# Altium PCB conn_board.PcbDoc (part 1 of 2)
Units mm, origin at the board's own origin, x right, y up, seen from the top; angles counter-clockwise.
Board outline 125 x 100 mm, 2 copper layers (Top Layer, Bottom Layer); 85 components, 65 nets, 284 pads, 72 vias.
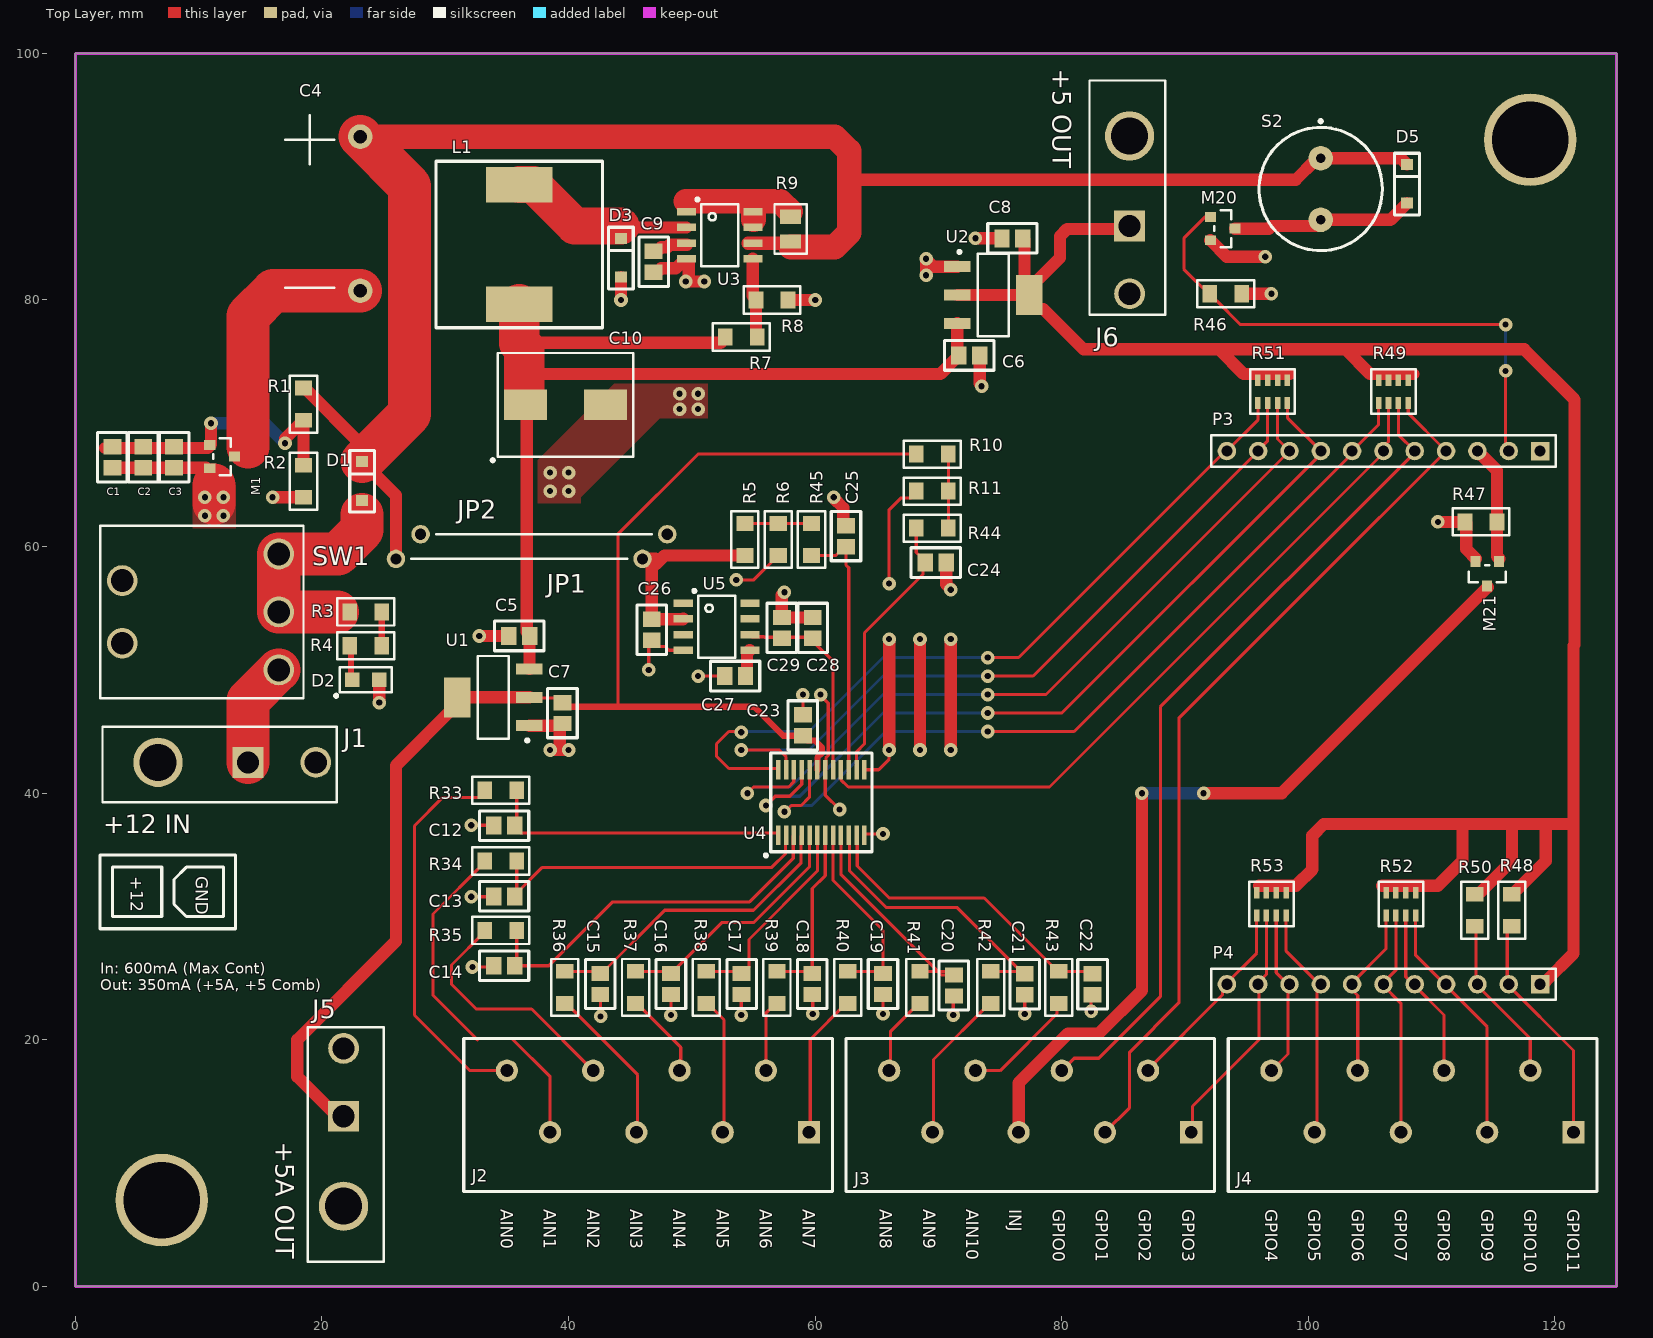
[diagram p0: Top Layer view]
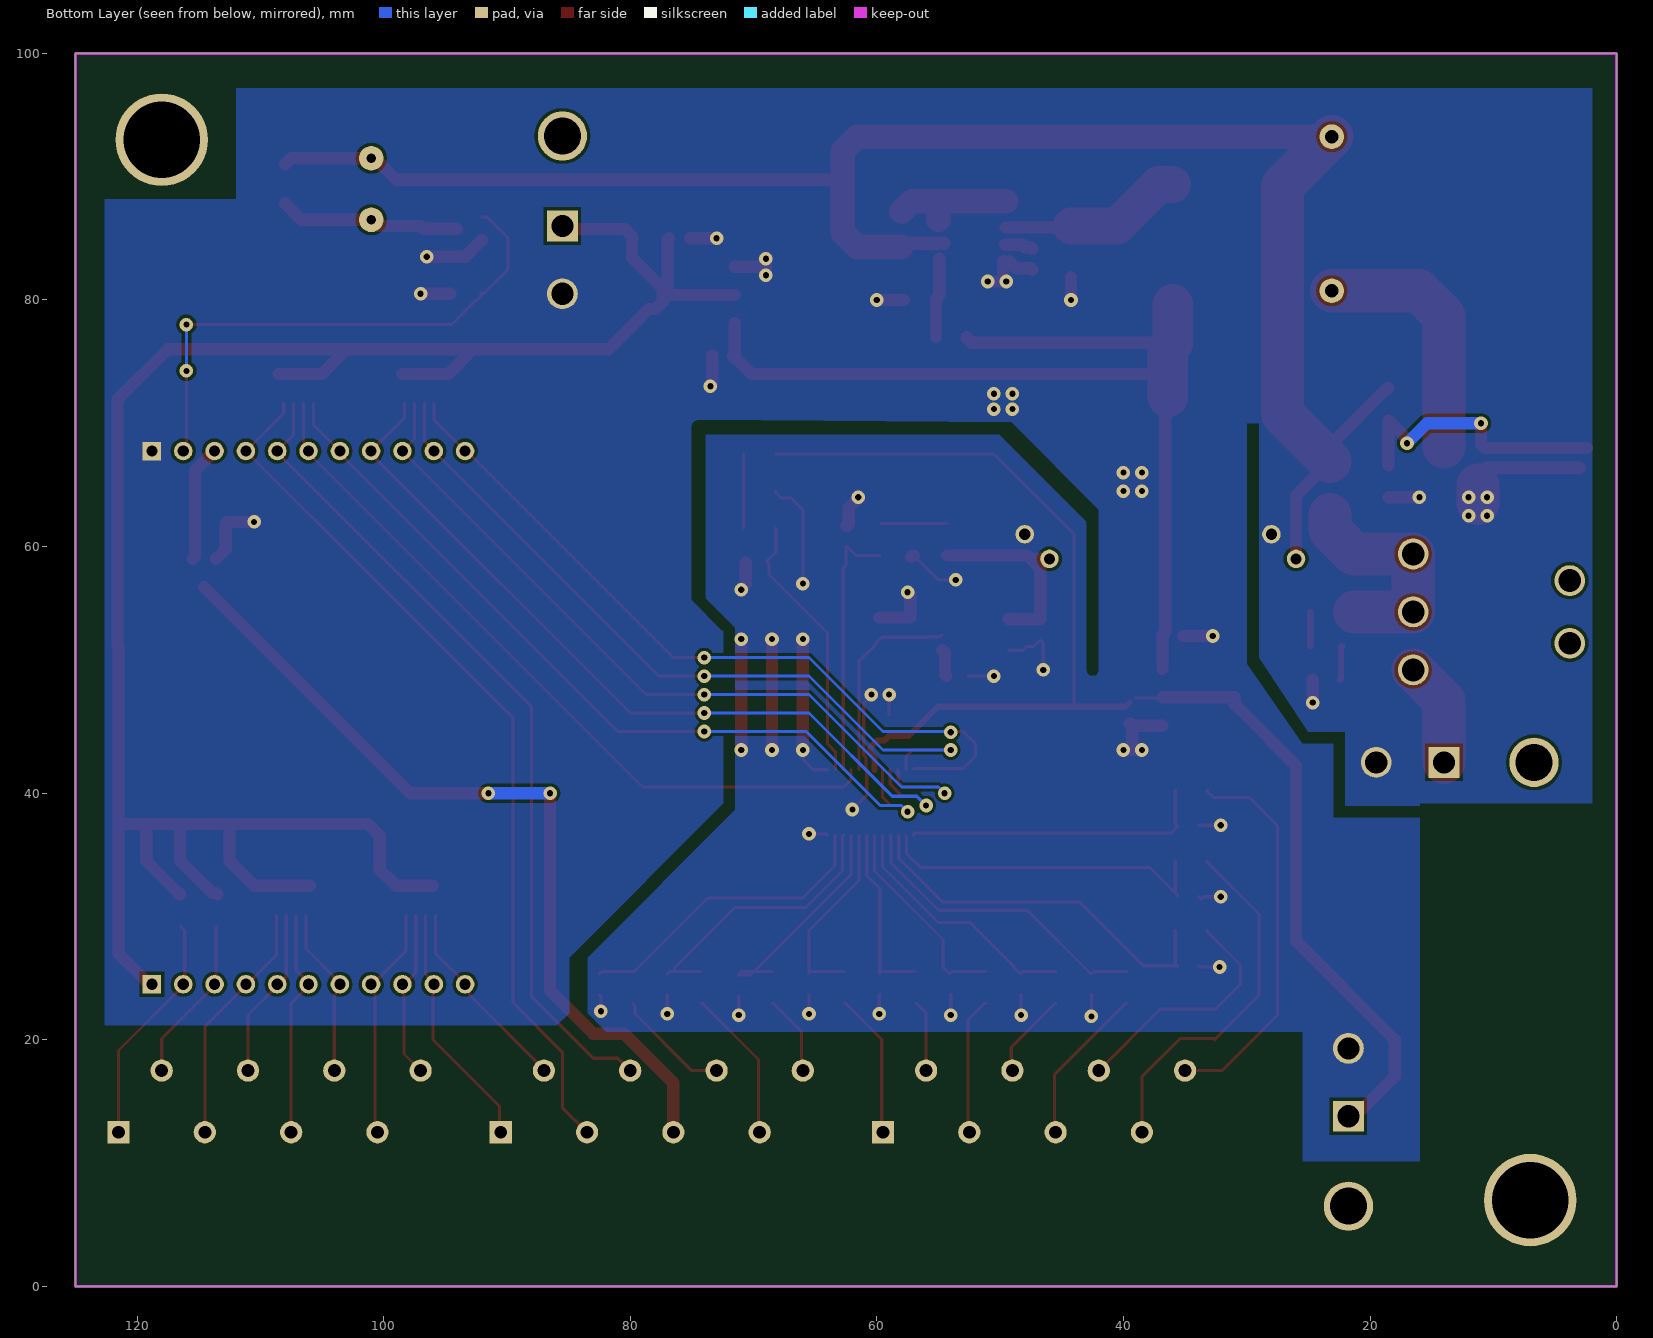
[diagram p1: Bottom Layer view, seen from below]

## Layer stack, top to bottom
Top Solder: solder mask 0.0102, Solder Resist, Dk 3.5
Top Layer: signal copper 0.0356
Dielectric 1: dielectric 0.32, FR-4, Dk 4.8
Bottom Layer: signal copper 0.0356
Bottom Solder: solder mask 0.0102, Solder Resist, Dk 3.5

## Board outline
0,0 125,0 125,100 0,100

## Design rules (kind name [scope] priority, off if disabled: settings)
BoardOutlineClearance BoardOutlineClearance_JLC [All] p1: gap=0.2 ignorepadtopadclearanceinfootprint=FALSE
Clearance Clearance_JLC [All] p1: gap=0.254 ignorepadtopadclearanceinfootprint=FALSE except(0: SMDPad-Hole Fill-Hole Poly-Hole Region-Hole Text-Hole; 0.127: Arc-Arc Arc-Track Track-Track SMDPad-SMDPad Fill-Fill Fill-Poly Fill-Region Poly-Region Region-Region; 0.15: SMDPad-Text THPad-Text Via-Text; 0.2: Arc-SMDPad Track-SMDPad; 0.33: Arc-THPad Track-THPad; 0.54: THPad-THPad THPad-Via THPad-Hole Via-Hole; 1: Poly-Poly)
Clearance [All] p2: gap=0.254 ignorepadtopadclearanceinfootprint=FALSE except(0: Arc-Hole Track-Hole SMDPad-Hole THPad-Hole Via-Hole Fill-Hole Poly-Hole Region-Hole Text-Hole)
HoleSize ViaSize_JLC [IsVia] p1: absolutevalues=TRUE maxlimit=6.3 minlimit=0.3 maxpercent=80.000 minpercent=20.000
HoleSize PadSize_JLC [IsPad] p2: absolutevalues=TRUE maxlimit=6.35 minlimit=0.7 maxpercent=80.000 minpercent=20.000
HoleSize HoleSize_JLC [All] p3: absolutevalues=TRUE maxlimit=6.3 minlimit=0.25 maxpercent=80.000 minpercent=20.000
HoleSize [All] p4: absolutevalues=TRUE maxlimit=2.54 minlimit=0.025 maxpercent=80.000 minpercent=20.000
HoleToHoleClearance HoleToHoleClearance_JLC [All] p1: gap=0.5 allowstackedmicrovias=TRUE
HoleToHoleClearance [All] p2: gap=0.254 allowstackedmicrovias=TRUE
MinimumAnnularRing MinViaDiam_JLC [IsVia] p1: minimumring=0.23
MinimumAnnularRing PTHDiam_JLC [All] p2: minimumring=0.15
MinimumSolderMaskSliver [All] p1: minsoldermaskwidth=0.2
PlaneClearance PlaneClearance_inPolygon [InPolygon] p1: clearance=1
PlaneClearance PlaneClearance_JLC [All] p2: clearance=1
PlaneClearance [All] p3: clearance=0.508
PolygonConnect PolygonConnect_Via [All] p1: connectstyle=Direct reliefconductorwidth=0.4 reliefentries=4 polygonreliefangle="90 Angle" airgapwidth=0.254
PolygonConnect [All] p2: connectstyle=Relief reliefconductorwidth=0.254 reliefentries=4 polygonreliefangle="90 Angle" airgapwidth=0.254
RoutingVias RoutingVias_JLC [All] p1: holewidth=0.711 width=1.27 viastyle="Through Hole" minholewidth=0.02 minwidth=0.45 maxholewidth=0.711 maxwidth=1.27
RoutingVias [All] p2: holewidth=0.711 width=1.27 viastyle="Through Hole" minholewidth=0.711 minwidth=1.27 maxholewidth=0.711 maxwidth=1.27
SilkToSolderMaskClearance PadToSilk_JLC [IsPad] p1: minsilkscreentomaskgap=0.15 clearancetoexposedcopper=TRUE
SolderMaskExpansion SolderMaskExpansion_JLC [All] p1: expansion=0.05 istentingtop=FALSE
SolderMaskExpansion [All] p2: expansion=0.102 istentingtop=FALSE
Width Width_JLC_GND [InNet('GND')] p1: maxlimit=5.5 minlimit=0.127 preferedwidth=0.254 minimp=50.000000 maximp=50.000000 favimp=50.000000
Width Width_JLC_HighPower [InNetClass('HighPower')] p2: maxlimit=5.5 minlimit=1 preferedwidth=3.3 minimp=50.000000 maximp=50.000000 favimp=50.000000
Width Width_JLC_LowPower [InNetClass('LowPower')] p3: maxlimit=2 minlimit=0.254 preferedwidth=1.5 minimp=50.000000 maximp=50.000000 favimp=50.000000
Width Width_JLC_Signal [InNetClass('Signal')] p4: maxlimit=1 minlimit=0.127 preferedwidth=0.254
Width Width_JLC [All] p5: maxlimit=1 minlimit=0.127 preferedwidth=0.254
Width [All] p6: maxlimit=0.254 minlimit=0.254 preferedwidth=0.254
25 further rules are at their usual default settings.

## Classes and differential pairs
net class Signal: 5VREF 12VDO +5 +5A AIN0 AIN1 AIN2 AIN3 AIN4 AIN5 AIN6 AIN7 AIN8 AIN9 AIN10 BUZZER FAIN0 FAIN1 FAIN2 FAIN3 FAIN4 FAIN5 FAIN6 FAIN7 FAIN8 FAIN9 FAIN10 FAIN13 FAIN14 GND GPIO0 GPIO1 GPIO2 GPIO3 GPIO4 GPIO5 GPIO6 GPIO7 GPIO8 GPIO9 GPIO10 GPIO11 INJ INJSW NetC1_2 NetP3_6 NetP3_7 NetP3_8 NetP3_9 NetP3_10 NetP3_11 NetR5_1 NetR7_2 NetR10_1
net class LowPower: 6VDCDC 12VDO +5 +5A BUZZER GND INJ INJSW NetD2_2 NetD5_2 NetR3_1
net class HighPower: 6VDCDC 12VDO +12 GND NetC4_2 NetJ1_1 SWITCH_COLLECTOR SWITCH_EMITTER
component class conn_board_power: C1 C2 C3 C4 C5 C6 C7 C8 C9 C10 D1 D2 D3 J1 L1 M1 R1 R2 R3 R4 R5 R6 R7 R8 R9 R10 R11 S1 SW1 U1 U2 U3
component class conn_board_interfaces: D5 J2 J3 J4 J5 J6 M20 M21 P3 P4 R46 R47 R48 R49 R50 R51 R52 R53 S2
component class conn_board_adc: C12 C13 C14 C15 C16 C17 C18 C19 C20 C21 C22 C23 C24 C25 C26 C27 C28 C29 JP1 JP2 R33 R34 R35 R36 R37 R38 R39 R40 R41 R42 R43 R44 R45 U4 U5

## Components (designator, comment, footprint, x,y, rotation, side; value= is the part's Value field where it differs from the comment)
C1 "4.7uF" CAP_0805 3,67.25 r90 top
C2 "4.7uF" CAP_0805 5.5,67.25 r90 top
C3 "4.7uF" CAP_0805 8,67.25 r90 top
C4 "22000uF" UVR1C223MRD6_BENT_F 23.1,87 r180 top
C5 "1uF" CAP_0805 36,52.75 r0 top
C6 "1uF" CAP_0805 72.5,75.5 r180 top
C7 "4.7uF" CAP_0805 39.5,46.5 r90 top
C8 "4.7uF" CAP_0805 76,85 r0 top
C9 "390pF" CAP_0805 46.9,83.1 r90 top
C10 "470uF" UUD1C471MNL1GS 39.75,71.5 r90 top
C12 "0.1uF" CAP_0805 34.773,37.365 r0 top
C13 "0.1uF" CAP_0805 34.773,31.631 r0 top
C14 "0.1uF" CAP_0805 34.773,26 r0 top
C15 "0.1uF" CAP_0805 42.568,24.523 r90 top
C16 "0.1uF" CAP_0805 48.301,24.523 r90 top
C17 "0.1uF" CAP_0805 54.034,24.523 r90 top
C18 "0.1uF" CAP_0805 59.767,24.523 r90 top
C19 "0.1uF" CAP_0805 65.5,24.523 r90 top
C20 "0.1uF" CAP_0805 71.25,24.4 r90 top
C21 "0.1uF" CAP_0805 77,24.5 r90 top
C22 "0.1uF" CAP_0805 82.5,24.5 r90 top
C23 "0.1uF" CAP_0805 59,45.5 r90 top
C24 "0.1uF" CAP_0805 69.773,58.7 r180 top
C25 "0.1uF" CAP_0805 62.5,60.85 r270 top
C26 "4.7uF" CAP_0805 46.75,53.25 r90 top
C27 "1uF" CAP_0805 53.5,49.5 r0 top
C28 "4.7uF" CAP_0805 59.8,53.4 r270 top
C29 "1uF" CAP_0805 57.3,53.4 r270 top
D1 "1N5819" SOD123 23.25,66.9 r0 top
D2 "RED" 150080SS75000 23.55,49.2 r180 top
D3 "1N5819" SOD123 44.25,85 r0 top
D5 "1N5819" SOD123 108,91 r0 top
J1 "CONN HEADER R/A 2POS" "2 POS MOLEX" 6.7,42.5 r270 top
J2 "TBL002A-350-08GR-2OR" CUI_TBL002A-350-08GR-2OR 59.5,12.5 r180 top
J3 "TBL002A-350-08GR-2OR" CUI_TBL002A-350-08GR-2OR 90.5,12.5 r180 top
J4 "TBL002A-350-08GR-2OR" CUI_TBL002A-350-08GR-2OR 121.5,12.5 r180 top
J5 "CONN HEADER R/A 2POS" "2 POS MOLEX" 21.75,6.5 r0 top
J6 "CONN HEADER R/A 2POS" "2 POS MOLEX" 85.5,93.3 r180 top
JP1 "JUMPER" JMP_20MM 46,59 r180 top
JP2 "JUMPER" JMP_20MM 48,61 r180 top
L1 "220µH" INDP125125X600N 36,84.5 r90 top
M1 "DMN6075S-7" FP-SOT23-MFG 11.9,67.3 r0 top
M20 "DMN6075S-7" FP-SOT23-MFG 93.05,85.79 r0 top
M21 "DMN6075S-7" FP-SOT23-MFG 114.5,57.8 r270 top
P3 "Header 11" HDR1X11 118.79,67.75 r180 top
P4 "Header 11" HDR1X11 118.79,24.5 r180 top
R1 "1MR" RES_0805_PANASONIC 18.5,71.55 r0 top
R2 "160kR" RES_0805_PANASONIC 18.5,65.3 r180 top
R3 "330R" RES_0805_PANASONIC 23.55,54.7 r270 top
R4 "330R" RES_0805_PANASONIC 23.55,51.95 r90 top
R5 "4.7kR" RES_0805_PANASONIC 54.3,60.577 r0 top
R6 "1.24kR" RES_0805_PANASONIC 57,60.577 r0 top
R7 "4.7kR" RES_0805_PANASONIC 54,77 r90 top
R8 "1.24kR" RES_0805_PANASONIC 56.5,80 r270 top
R9 "250mR" CSR1206FKR250 58,85.75 r90 top
R10 "1.24kR" RES_0805_PANASONIC 69.5,67.5 r270 top
R11 "1.24kR" RES_0805_PANASONIC 69.5,64.5 r90 top
R33 "330R" RES_0805_PANASONIC 34.5,40.233 r90 top
R34 "330R" RES_0805_PANASONIC 34.5,34.5 r90 top
R35 "330R" RES_0805_PANASONIC 34.5,28.869 r90 top
R36 "330R" RES_0805_PANASONIC 39.699,24.25 r180 top
R37 "330R" RES_0805_PANASONIC 45.432,24.25 r180 top
R38 "330R" RES_0805_PANASONIC 51.165,24.25 r180 top
R39 "330R" RES_0805_PANASONIC 56.898,24.25 r180 top
R40 "330R" RES_0805_PANASONIC 62.631,24.25 r180 top
R41 "330R" RES_0805_PANASONIC 68.5,24.25 r180 top
R42 "330R" RES_0805_PANASONIC 74.25,24.25 r180 top
R43 "330R" RES_0805_PANASONIC 79.75,24.25 r180 top
R44 "330R" RES_0805_PANASONIC 69.5,61.5 r270 top
R45 "330R" RES_0805_PANASONIC 59.7,60.577 r0 top
R46 "4.7kR" RES_0805_PANASONIC 93.3,80.5 r90 top
R47 "4.7kR" RES_0805_PANASONIC 114,62 r270 top
R48 "4.7kR" RES_0805_PANASONIC 116.5,30.5 r180 top
R49 "4.7kR" CAY16-472J4LF 106.9,72.575 r180 top
R50 "4.7kR" RES_0805_PANASONIC 113.5,30.5 r180 top
R51 "4.7kR" CAY16-472J4LF 97.1,72.575 r180 top
R52 "4.7kR" CAY16-472J4LF 107.5,31 r180 top
R53 "4.7kR" CAY16-472J4LF 97,31 r180 top
S2 "CMI-9605-1280T" CMI-9605-1280T 101,89 r0 top
SW1 "SPDT" 100SP1T2B4M6QE 16.5,54.7 r270 top
U1 "LDL1117S50R" SOT230P700X180-4N 33.9,47.775 r180 top
U2 "LDL1117S50R" SOT230P700X180-4N 74.45,80.4 r0 top
U3 "MC33063ADR" SOIC_8 52.25,85.25 r0 top
U4 "MAX11624EEG+" QSOP24 60.5,39.25 r90 top
U5 "REF5050AIDR" SOIC_8 52,53.5 r0 top

## Footprints (in the part's own frame and the unit in brackets; to place one, negate y for a bottom-side part, rotate by r counter-clockwise, add the part's x,y. Pads: shape width x height; smd on the part's side, far side on the other; paste and mask are expansions set on the pad)
"2 POS MOLEX" [mm] "1724480002"
  rect 2.5x2.5 hole 1.8 mask+0.06: 1(0,7.3)
  round 2.5 hole 1.8 mask+0.06: 2(0,12.8)
  round 4 hole 3 unplated mask+0.06: MNT(0,0)
  silkscreen extent -2.9,-4.5 3.25,14.5, body extent -2.7,-6.57 3.1,13.37, height 11.4
100SP1T2B4M6QE [mm]
  round 2.5 hole 1.85 mask+0.06: 1(4.7,0) 1(4.7,0) 2(0,0) 2(0,0) 3(-4.7,0) 3(-4.7,0) 4(-2.54,-12.7) 4(-2.54,-12.7) 4(2.54,-12.7) 4(2.54,-12.7)
  silkscreen extent -7,-14.5 7,2, body extent -6.35,-26.56 6.35,0.59, height 6.87
150080SS75000 [mm] "150080SS75000"
  rect 1.2x1.2 smd mask+0.06: 1(-1.1,0) 2(1.1,0)
  silkscreen extent -2.1,-1 2.52,1.42
CAP_0805 [mm] "Chip Capacitor, 2-Leads, Body 2.05x1.30mm, IPC Medium Density"
  rect 1.25x1.45 smd mask+0.06: 1(-0.85,0) 2(0.85,0)
  silkscreen extent -2,-1.2 2,1.2, body extent -1.07,-0.7 1.07,0.7, height 1.25
CAY16-472J4LF [mm] "CAY16-472J4LF"
  rect 0.45x0.95 smd mask+0.06: 1(-1.2,0.925) 2(-1.2,-0.925) 3(-0.4,0.925) 4(-0.4,-0.925) 5(0.4,0.925) 6(0.4,-0.925) 7(1.2,0.925) 8(1.2,-0.925)
  silkscreen extent -1.8,-1.8 1.8,1.8, body extent -1.6,-0.8 1.6,0.8, height 0.51
CMI-9605-1280T [mm] "MAGNETIC BUZZER INDICATOR"
  round 2 hole 0.75 mask+0.06: 1(0,2.5) 2(0,-2.5)
  silkscreen extent -5,-5 5,5.62, body extent -4.8,-4.8 4.8,4.8, height 5.01
CSR1206FKR250 [mm] "1206 Res"
  rect 1.15x1.7 smd mask+0.06: 1(-1,0) 2(1,0)
  silkscreen extent -2,-1.3 2,1.3, body extent -1.52,-0.77 1.52,0.78, height 0.54
CUI_TBL002A-350-08GR-2OR [mm]
  rect 1.8x1.8 hole 1.05 mask+0.06: 1(0,0)
  round 1.8 hole 1.05 mask+0.06: 2(3.5,-5) 3(7,0) 4(10.5,-5) 5(14,0) 6(17.5,-5) 7(21,0) 8(24.5,-5)
  silkscreen extent -1.9,-7.6 28,4.8, body extent -1.73,-7.4 27.78,4.6, height 12.85
FP-SOT23-MFG [mm]
  rect 0.9x0.8 smd paste+0 mask+0: D(1,0) G(-1,0.95) S(-1,-0.95)
  silkscreen extent -0.7,-1.5 0.7,1.5, body extent -1.55,-1.6 1.55,1.6, height 0.25
HDR1X11 [mm] "Connector; Header; 11 Position"
  rect 1.5x1.5 hole 0.9: 1(0,0)
  round 1.5 hole 0.9: 2(2.54,0) 3(5.08,0) 4(7.62,0) 5(10.16,0) 6(12.7,0) 7(15.24,0) 8(17.78,0) 9(20.32,0) 10(22.86,0) 11(25.4,0)
  silkscreen extent -1.27,-1.27 26.67,1.27
INDP125125X600N [mm]
  rect 2.9x5.4 smd mask+0.06: 1(-4.85,0) 2(4.85,0)
  silkscreen extent -6.75,-6.75 6.75,6.75, body extent -6.25,-6.25 6.25,6.25, height 6
JMP_20MM [mm]
  round 1.5 hole 0.9 mask+0.06: 1(0,0) 2(20,0)
  silkscreen extent 1.25,0 18.75,0
QSOP24 [mm]
  rect 1.6x0.36 smd mask+0.06: 1(-2.66,3.492) 2(-2.66,2.857) 3(-2.66,2.222) 4(-2.66,1.587) 5(-2.66,0.952) 6(-2.66,0.317) 7(-2.66,-0.318) 8(-2.66,-0.953) 9(-2.66,-1.588) 10(-2.66,-2.222) 11(-2.66,-2.857) 12(-2.66,-3.492) 13(2.66,-3.492) 14(2.66,-2.857) 15(2.66,-2.222) 16(2.66,-1.587) 17(2.66,-0.952) 18(2.66,-0.317) 19(2.66,0.318) 20(2.66,0.953) 21(2.66,1.588) 22(2.66,2.222) 23(2.66,2.857) 24(2.66,3.492)
  silkscreen extent -4.42,-4.1 4,4.62
RES_0805_PANASONIC [mm]
  rect 1.4x1.2 smd mask+0.06: 1(0,1.3) 2(0,-1.3)
  silkscreen extent -1.1,-2.3 1.1,2.3
SOD123 [mm]
  rect 0.95x0.9 smd mask+0.06: 1(0,0) 2(0,-3.15)
  silkscreen extent -1,-4.1 1,0.9
SOIC_8 [mm] "SOIC, 8-Leads, Body 4.91x3.90mm, Pitch 1.27mm, IPC Medium Density"
  rect 1.55x0.6 smd mask+0.06: 1(-2.7,1.905) 2(-2.7,0.635) 3(-2.7,-0.635) 4(-2.7,-1.905) 5(2.7,-1.905) 6(2.7,-0.635) 7(2.7,0.635) 8(2.7,1.905)
  silkscreen extent -1.92,-2.5 1.5,3.02, body extent -3,-2.5 3,2.5, height 1.75
SOT230P700X180-4N [mm] "SOT223, 4-Leads, Body 6.50x7.00mm (avg), Pitch 2.30mm, IPC Medium Density"
  rect 2.15x0.9 smd mask+0.06: 1(-2.925,2.3) 2(-2.925,0) 3(-2.925,-2.3)
  rect 2.15x3.25 smd mask+0.06: 2(2.925,0)
  silkscreen extent -2.88,-3.35 1.25,3.62, body extent -3.5,-3.35 3.5,3.35, height 1.8
UUD1C471MNL1GS [mm] "UUD1C471MNL1GS"
  rect 2.5x3.5 smd mask+0.06: 1(0,3.25) 2(0,-3.25)
  silkscreen extent -4.62,-5.5 4.2,6.02
UVR1C223MRD6_BENT_F [mm] "UVR1C223MRD6"
  round 2 hole 1.1 mask+0.06: 1(0,-6.25) 2(0,6.25)
  body extent 7,-12.49 47,12.49, height 25

## Part data
C1 C2 C3 C7 C8 C26 C28: library part CL21A475KAQNNNE, "SAMSUNG ELECTRO-MECHANICS - CL21A475KAQNNNE - SMD Multilayer Ceramic Capacitor, 4.7 µF, 25 V, 0805 [2012 Metric], ± 10%, X5R, CL Series", Case Code (Imperial)=0805, Case Code (Metric)=2012, Dielectric=X5R, Manufacturer=Samsung, Max Operating Temperature=85°C, Min Operating Temperature=-55°C, Package Quantity=1, Supplier Part Number 1=1276-1244-1-ND, Tolerance=10%, Voltage Rating=25V, Capacitance=4.7uF, Case/Package=0805, Category="Ceramic Capacitors", ComponentLink1Description=https://datasheet.ciiva.com/25798/cl21a475kaqnnne-25798882.pdf?src-supplier=Digi-Key, ComponentLink1URL=https://datasheet.ciiva.com/25798/cl21a475kaqnnne-25798882.pdf?src-supplier=Digi-Key, Depth=1.25mm, Height=1.25mm, Lead Free="Lead Free", Length=2mm, Manufacturer Part Number=CL21A475KAQNNNE, Mount="Surface Mount", Packaging="Tape and Reel", Pricing 1="1=0.11000, 10=0.08100, 50=0.04600, 100=0.03820, 500=0.02678, 1000=0.02216 (USD)", Radiation Hardening=No, RoHS=Yes, Stock 1=671990, Supplier 1=Digi-Key, Thickness=0.055inch, Voltage Rating (DC)=25V, Width=0.049inch
C4: library part UVR1C223MRD6, "Cap Aluminum 22000uF 16V 20% (25 X 40mm) Radial 12.5mm 4000mA 2000 hr 85°C Bulk", Capacitance=22mF, Case/Package=Radial, Dielectric Material=Aluminium, Leakage Current=10.56mA, Manufacturer=Nichicon, Max Operating Temperature=85°C, Min Operating Temperature=-40°C, Package Quantity=180, Ripple Current=4A, Supplier Part Number 1=493-1054-ND, Tolerance=20%, Voltage Rating=16V, Category=Capacitor, ComponentLink1Description=https://datasheet.ciiva.com/17515/e-vr-17515877.pdf?src-supplier=Avnet+Europe, ComponentLink1URL=https://datasheet.ciiva.com/17515/e-vr-17515877.pdf?src-supplier=Avnet+Europe, ComponentLink2Description=https://datasheet.ciiva.com/118/e-vr-118733.pdf?src-supplier=Digi-Key, ComponentLink2URL=https://datasheet.ciiva.com/118/e-vr-118733.pdf?src-supplier=Digi-Key, ComponentLink3Description=http://datasheet.octopart.com/UVR1C223MRD6-Nichicon-datasheet-2149.pdf?src-supplier=Digi-Key, ComponentLink3URL=http://datasheet.octopart.com/UVR1C223MRD6-Nichicon-datasheet-2149.pdf?src-supplier=Digi-Key, ComponentLink4Description=http://datasheet.octopart.com/UVR1C223MRD6-Nichicon-datasheet-12518647.pdf?src-supplier=Newark, ComponentLink4URL=http://datasheet.octopart.com/UVR1C223MRD6-Nichicon-datasheet-12518647.pdf?src-supplier=Newark, ComponentLink5Description=http://datasheet.octopart.com/UVR1C223MRD6-Nichicon-datasheet-24896455.pdf?src-supplier=TME, ComponentLink5URL=http://datasheet.octopart.com/UVR1C223MRD6-Nichicon-datasheet-24896455.pdf?src-supplier=TME, ComponentLink6Description=http://datasheet.octopart.com/UVR1C223MRD6-Nichicon-datasheet-41169141.pdf?src-supplier=Newark, ComponentLink6URL=http://datasheet.octopart.com/UVR1C223MRD6-Nichicon-datasheet-41169141.pdf?src-supplier=Newark, ComponentLink7Description=http://datasheet.octopart.com/UVR1C223MRD6-Nichicon-datasheet-58177256.pdf?src-supplier=Newark, ComponentLink7URL=http://datasheet.octopart.com/UVR1C223MRD6-Nichicon-datasheet-58177256.pdf?src-supplier=Newark, Contact Plating=Tin, Diameter=25mm, Dissipation Factor=0.2%, Height=40mm, Height - Seated (Max)=1.575inch, Lead Diameter=1mm, Lead Free="Lead Free", Lead Pitch=12.5mm, Length=40mm, Life (Hours)=2000Hour, Manufacturer Part Number=UVR1C223MRD6, Mount="Through Hole", Number of Pins=2, Packaging=Bulk, Pricing 1="1=3.85000, 10=3.46700, 50=3.00440, 100=2.61910, 500=2.15694, 1000=2.00287, 2500=1.96436, 5000=1.92584 (USD)", Radiation Hardening=No, Stock 1=153, Supplier 1=Digi-Key, Termination=Radial, Voltage Rating (DC)=16V
C5 C6 C27 C29: library part C0805C105Z4VACTU, "Cap Ceramic 1uF 16V Y5V -20% to 80% Pad SMD 0805 85C T/R", Case Code (Imperial)=0805, Case Code (Metric)=2012, Dielectric=Y5V, Dielectric Material=Ceramic, Manufacturer=KEMET, Max Operating Temperature=85°C, Min Operating Temperature=-30°C, Package Quantity=1, Supplier Part Number 1=399-8011-1-ND, Tolerance=80%, Voltage=16V, Capacitance=1uF, Case/Package=0805, Category=Capacitor, ComponentLink1Description=https://datasheet.ciiva.com/6074/1698780-6074369.pdf?src-supplier=Farnell, ComponentLink1URL=https://datasheet.ciiva.com/6074/1698780-6074369.pdf?src-supplier=Farnell, ComponentLink2Description=https://datasheet.ciiva.com/16623/datasheetpn-c0805c105z4vac7800-16623623.pdf?src-supplier=Avnet+Europe, ComponentLink2URL=https://datasheet.ciiva.com/16623/datasheetpn-c0805c105z4vac7800-16623623.pdf?src-supplier=Avnet+Europe, ComponentLink3Description=https://datasheet.ciiva.com/14604/70095383-14604106.pdf?src-supplier=Allied+Electronics, ComponentLink3URL=https://datasheet.ciiva.com/14604/70095383-14604106.pdf?src-supplier=Allied+Electronics, ComponentLink4Description=https://datasheet.ciiva.com/7600/1698780-7600029.pdf?src-supplier=Newark, ComponentLink4URL=https://datasheet.ciiva.com/7600/1698780-7600029.pdf?src-supplier=Newark, ComponentLink5Description=https://datasheet.ciiva.com/14589/70095383-14589407.pdf?src-supplier=Allied+Electronics, ComponentLink5URL=https://datasheet.ciiva.com/14589/70095383-14589407.pdf?src-supplier=Allied+Electronics, ComponentLink6Description=http://datasheet.octopart.com/C0805C105Z4VACTU-Kemet-datasheet-13692877.pdf?src-supplier=Element14, ComponentLink6URL=http://datasheet.octopart.com/C0805C105Z4VACTU-Kemet-datasheet-13692877.pdf?src-supplier=Element14, ComponentLink7Description=http://datasheet.octopart.com/C0805C105Z4VACTU-Kemet-datasheet-503297.pdf?src-supplier=Newark, ComponentLink7URL=http://datasheet.octopart.com/C0805C105Z4VACTU-Kemet-datasheet-503297.pdf?src-supplier=Newark, ComponentLink8Description=http://datasheet.octopart.com/C0805C105Z4VACTU-KEMET-datasheet-101576167.pdf?src-supplier=Farnell, ComponentLink8URL=http://datasheet.octopart.com/C0805C105Z4VACTU-KEMET-datasheet-101576167.pdf?src-supplier=Farnell, ComponentLink9Description=http://datasheet.octopart.com/C0805C105Z4VACTU-KEMET-datasheet-83957834.pdf?src-supplier=TME, ComponentLink9URL=http://datasheet.octopart.com/C0805C105Z4VACTU-KEMET-datasheet-83957834.pdf?src-supplier=TME, ComponentLink10Description=http://datasheet.octopart.com/C0805C105Z4VACTU-Kemet-datasheet-5313890.pdf?src-supplier=Verical, ComponentLink10URL=http://datasheet.octopart.com/C0805C105Z4VACTU-Kemet-datasheet-5313890.pdf?src-supplier=Verical, ComponentLink11Description=http://datasheet.octopart.com/C0805C105Z4VAC-TU-Kemet-datasheet-8204015.pdf?src-supplier=Jameco, ComponentLink11URL=http://datasheet.octopart.com/C0805C105Z4VAC-TU-Kemet-datasheet-8204015.pdf?src-supplier=Jameco, ComponentLink12Description=http://datasheet.octopart.com/C0805C105Z4VACTU-Kemet-datasheet-464.pdf?src-supplier=Allied+Electronics, ComponentLink12URL=http://datasheet.octopart.com/C0805C105Z4VACTU-Kemet-datasheet-464.pdf?src-supplier=Allied+Electronics, ComponentLink13Description=http://datasheet.octopart.com/C0805C105Z4VACTU-Kemet-datasheet-11554470.pdf?src-supplier=Arrow, ComponentLink13URL=http://datasheet.octopart.com/C0805C105Z4VACTU-Kemet-datasheet-11554470.pdf?src-supplier=Arrow, ComponentLink14Description=http://datasheet.octopart.com/C0805C105Z4VACTU-Kemet-datasheet-66128697.pdf?src-supplier=Element14, ComponentLink14URL=http://datasheet.octopart.com/C0805C105Z4VACTU-Kemet-datasheet-66128697.pdf?src-supplier=Element14, ComponentLink15Description=http://datasheet.octopart.com/C0805C105Z4VACTU-Kemet-datasheet-66325528.pdf?src-supplier=Newark, ComponentLink15URL=http://datasheet.octopart.com/C0805C105Z4VACTU-Kemet-datasheet-66325528.pdf?src-supplier=Newark, ComponentLink16Description=http://datasheet.octopart.com/C0805C105Z4VACTU-Kemet-datasheet-67847115.pdf?src-supplier=TME, ComponentLink16URL=http://datasheet.octopart.com/C0805C105Z4VACTU-Kemet-datasheet-67847115.pdf?src-supplier=TME, ComponentLink17Description=http://datasheet.octopart.com/C0805C105Z4VACTU-KEMET-datasheet-84169754.pdf, ComponentLink17URL=http://datasheet.octopart.com/C0805C105Z4VACTU-KEMET-datasheet-84169754.pdf, ComponentLink18Description=http://datasheet.octopart.com/C0805C105Z4VACTU-KEMET-datasheet-41193421.pdf?src-supplier=Master+Electronics, ComponentLink18URL=http://datasheet.octopart.com/C0805C105Z4VACTU-KEMET-datasheet-41193421.pdf?src-supplier=Master+Electronics, Contact Material=Tin, Depth=1.25mm, Dissipation Factor=7%, Height=1.25mm, Lead Free="Lead Free", Lead Pitch=0.75mm, Length=2mm, Manufacturer Part Number=C0805C105Z4VACTU, Mount="Surface Mount", Number of Pins=2, Packaging="Tape and Reel", Pricing 1="1=0.11000, 10=0.08100, 50=0.04420, 100=0.03620, 500=0.02584, 1000=0.02030 (USD)", Radiation Hardening=No, REACH SVHC="No SVHC", Stock 1=83211, Supplier 1=Digi-Key, Termination=SMD/SMT, Thickness=0.055inch, Voltage Rating=16V, Voltage Rating (DC)=16V, Width=0.049inch
C9: library part CL21C391JBANNNC, "Cap Ceramic 390pF 50V C0G 5% SMD 0805 125C Paper T/R", Case Code (Imperial)=0805, Case Code (Metric)=2012, Dielectric=C0G, Manufacturer=Samsung, Max Operating Temperature=125°C, Min Operating Temperature=-55°C, Package Quantity=1, Supplier Part Number 1=1276-1303-1-ND, Temperature Coefficient=300ppm/°C, Tolerance=5%, Voltage=50V, Capacitance=390pF, Case/Package=0805, Category="Ceramic Capacitors", ComponentLink1Description=https://datasheet.ciiva.com/25733/cl21c391jbannnc-25733106.pdf?src-supplier=Digi-Key, ComponentLink1URL=https://datasheet.ciiva.com/25733/cl21c391jbannnc-25733106.pdf?src-supplier=Digi-Key, ComponentLink2Description=https://datasheet.ciiva.com/26838/getdatasheetpartid-687114-26838793.pdf?src-supplier=Verical, ComponentLink2URL=https://datasheet.ciiva.com/26838/getdatasheetpartid-687114-26838793.pdf?src-supplier=Verical, ComponentLink3Description=https://datasheet.ciiva.com/29200/453712-da-01-en-vs-kondensator-0805-29200047.pdf?src-supplier=Conrad, ComponentLink3URL=https://datasheet.ciiva.com/29200/453712-da-01-en-vs-kondensator-0805-29200047.pdf?src-supplier=Conrad, ComponentLink4Description=https://datasheet.ciiva.com/16448/cl05b104kq5nnnc-16448985.pdf?src-supplier=Future+Electronics, ComponentLink4URL=https://datasheet.ciiva.com/16448/cl05b104kq5nnnc-16448985.pdf?src-supplier=Future+Electronics, Construction=Flat, Depth=1.25mm, Height=0.65mm, Length=2mm, Manufacturer Part Number=CL21C391JBANNNC, Material=Ceramic, Mount="Surface Mount", Packaging="Tape and Reel", Pricing 1="1=0.11000, 10=0.08400, 50=0.04580, 100=0.03740, 500=0.02668, 1000=0.02096 (USD)", Radiation Hardening=No, RoHS=Yes, RoHS Compliant=Yes, Series=CL, Stock 1=98292, Supplier 1=Digi-Key, Thickness=0.03inch, Voltage Rating=50V, Width=0.049inch
C10: library part UUD1C471MNL1GS, "NICHICON   UUD1C471MNL1GS   CAP, ALU ELEC, 470UF, 16V, SMD", Case/Package=Radial, Dielectric Material=Aluminium, Leakage Current=3uA, Manufacturer=Nichicon, Max Operating Temperature=105°C, Min Operating Temperature=-55°C, Package Quantity=500, Ripple Current=450mA, Supplier Part Number 1=493-2266-1-ND, Tolerance=20%, Voltage=16V, Capacitance=470uF, Category=Capacitor, ComponentLink1Description=https://datasheet.ciiva.com/11781/0900766b80fa39e7-11781894.pdf?src-supplier=RSComponents, ComponentLink1URL=https://datasheet.ciiva.com/11781/0900766b80fa39e7-11781894.pdf?src-supplier=RSComponents, ComponentLink2Description=https://datasheet.ciiva.com/97/e-ud-97896.pdf?src-supplier=Digi-Key, ComponentLink2URL=https://datasheet.ciiva.com/97/e-ud-97896.pdf?src-supplier=Digi-Key, ComponentLink3Description=https://datasheet.ciiva.com/7781/66055-7781448.pdf?src-supplier=Element14, ComponentLink3URL=https://datasheet.ciiva.com/7781/66055-7781448.pdf?src-supplier=Element14, ComponentLink4Description=https://datasheet.ciiva.com/97/e-ud-97897.pdf?src-supplier=Digi-Key, ComponentLink4URL=https://datasheet.ciiva.com/97/e-ud-97897.pdf?src-supplier=Digi-Key, ComponentLink5Description=https://datasheet.ciiva.com/22693/66055-22693551.pdf?src-supplier=Element14, ComponentLink5URL=https://datasheet.ciiva.com/22693/66055-22693551.pdf?src-supplier=Element14, ComponentLink6Description=https://datasheet.ciiva.com/97/e-ud-97898.pdf?src-supplier=Digi-Key, ComponentLink6URL=https://datasheet.ciiva.com/97/e-ud-97898.pdf?src-supplier=Digi-Key, ComponentLink7Description=https://datasheet.ciiva.com/11685/e-ud-11685293.pdf?src-supplier=Avnet, ComponentLink7URL=https://datasheet.ciiva.com/11685/e-ud-11685293.pdf?src-supplier=Avnet, ComponentLink8Description=https://datasheet.ciiva.com/16502/e-ud-16502751.pdf?src-supplier=Future+Electronics, ComponentLink8URL=https://datasheet.ciiva.com/16502/e-ud-16502751.pdf?src-supplier=Future+Electronics, Contact Plating=Tin, Diameter=8mm, Dissipation Factor=0.2%, Height=10mm, Height - Seated (Max)=0.394inch, Impedance=170mR, Lead Diameter=1.1mm, Lead Free="Lead Free", Lead Pitch=3.1mm, Length=10mm, Life (Hours)=5000Hour, Manufacturer Part Number=UUD1C471MNL1GS, Number of Pins=2, Packaging="Tape and Reel", Pricing 1="1=0.69000, 10=0.50800, 25=0.43560, 100=0.34850, 250=0.31948 (USD)", Radiation Hardening=No, REACH SVHC="No SVHC", Ripple Current (AC)=450mA, RoHS=Yes, Stock 1=11602, Supplier 1=Digi-Key, Termination=SMD/SMT, Voltage Rating=16V, Voltage Rating (DC)=16V
C12 C13 C14 C15 C16 C17 C18 C19 C20 C21 C22 C23 C24 C25: library part C0805C104M3RACTU, "CAP CER 0.1UF 25V X7R 0805", Capacitance=100nF, Case Code (Imperial)=0805, Case Code (Metric)=2012, Dielectric=X7R, Dielectric Material=Ceramic, Manufacturer=KEMET, Max Operating Temperature=125°C, Min Operating Temperature=-55°C, Package Quantity=1, Supplier Part Number 1=399-8000-1-ND, Tolerance=20%, Voltage=25V, Case/Package=0805, Category=Capacitor, ComponentLink1Description=http://www.mouser.com/ds/2/212/KEM_C1002_X7R_SMD-1102033.pdf?src-supplier=Mouser, ComponentLink1URL=http://www.mouser.com/ds/2/212/KEM_C1002_X7R_SMD-1102033.pdf?src-supplier=Mouser, ComponentLink2Description=http://uk.rs-online.com/webdocs/13da/0900766b813da9ff.pdf?src-supplier=RSComponents, ComponentLink2URL=http://uk.rs-online.com/webdocs/13da/0900766b813da9ff.pdf?src-supplier=RSComponents, ComponentLink3Description=http://components.arrow.com/part/dataview/0323_00178100?src-supplier=Arrow+Europe, ComponentLink3URL=http://components.arrow.com/part/dataview/0323_00178100?src-supplier=Arrow+Europe, ComponentLink4Description=https://www.alliedelec.com/m/d/6f3b5eb83d09db50ed28bdc730567b33.pdf?src-supplier=Allied+Electronics, ComponentLink4URL=https://www.alliedelec.com/m/d/6f3b5eb83d09db50ed28bdc730567b33.pdf?src-supplier=Allied+Electronics, ComponentLink5Description=http://www.farnell.com/datasheets/2746330.pdf?src-supplier=Farnell, ComponentLink5URL=http://www.farnell.com/datasheets/2746330.pdf?src-supplier=Farnell, ComponentLink6Description=http://www.jameco.com/Jameco/Products/ProdDS/1566487.pdf?src-supplier=Jameco, ComponentLink6URL=http://www.jameco.com/Jameco/Products/ProdDS/1566487.pdf?src-supplier=Jameco, ComponentLink7Description=http://components.arrow.com/part/dataview/2091097S3491315N7429?src-supplier=Arrow+Electronics, ComponentLink7URL=http://components.arrow.com/part/dataview/2091097S3491315N7429?src-supplier=Arrow+Electronics, ComponentLink8Description=https://www.alliedelec.com/m/d/e7aa2b5497e2375e4ffc0e8be19e16e2.pdf?src-supplier=Allied+Electronics, ComponentLink8URL=https://www.alliedelec.com/m/d/e7aa2b5497e2375e4ffc0e8be19e16e2.pdf?src-supplier=Allied+Electronics, ComponentLink9Description=http://uk.rs-online.com/webdocs/13da/0900766b813daa05.pdf?src-supplier=RSComponents, ComponentLink9URL=http://uk.rs-online.com/webdocs/13da/0900766b813daa05.pdf?src-supplier=RSComponents, ComponentLink10Description=http://www.farnell.com/datasheets/2746330.pdf?src-supplier=Element14, ComponentLink10URL=http://www.farnell.com/datasheets/2746330.pdf?src-supplier=Element14, ComponentLink11Description=https://api.kemet.com/component-edge/download/datasheet/C0805C104M3RACTU.pdf?src-supplier=Digi-Key, ComponentLink11URL=https://api.kemet.com/component-edge/download/datasheet/C0805C104M3RACTU.pdf?src-supplier=Digi-Key, ComponentLink12Description=http://www.farnell.com/datasheets/1828800.pdf?src-supplier=Newark, ComponentLink12URL=http://www.farnell.com/datasheets/1828800.pdf?src-supplier=Newark, ComponentLink13Description=http://www.farnell.com/datasheets/2746330.pdf?src-supplier=Newark, ComponentLink13URL=http://www.farnell.com/datasheets/2746330.pdf?src-supplier=Newark, ComponentLink14Description=http://capacitoredge.kemet.com/capedge2/DataSheet?pn=C0805C104M3RACTU&src-supplier=Avnet, ComponentLink14URL=http://capacitoredge.kemet.com/capedge2/DataSheet?pn=C0805C104M3RACTU&src-supplier=Avnet, Depth=1.25mm, Dissipation Factor=5%, Height=0.9mm, Lead Pitch=0.75mm, Length=2mm, Manufacturer Part Number=C0805C104M3RACTU, Mount="Surface Mount", Packaging="Tape and Reel", Pricing 1="1=0.10000, 10=0.06800, 50=0.03700, 100=0.03020, 500=0.02160, 1000=0.01697 (USD)", Radiation Hardening=No, REACH SVHC="No SVHC", RoHS=Yes, Stock 1=305175, Supplier 1=Digi-Key, Termination=SMD/SMT, Thickness=0.035inch, Voltage Rating=25V, Voltage Rating (DC)=25V, Width=0.049inch
D1 D3 D5: library part 1N5819HW-7-F, "DIODES INC. - 1N5819HW-7-F - DIODE, SCKY RECTI, 1A, 40V, SOD123", Average Rectified Current=1A, Capacitance=110pF, Case/Package=SOD-123-2, Forward Voltage=450mV, Manufacturer=Diodes, Max Forward Surge Current (Ifsm)=25A, Max Operating Temperature=125°C, Max Power Dissipation=450mW, Max Repetitive Reverse Voltage (Vrrm)=40V, Min Operating Temperature=-65°C, Package Quantity=3000, Peak Reverse Current=50uA, Supplier Part Number 1=1N5819HW-FDICT-ND, Category=Diode, ComponentLink1Description=https://datasheet.ciiva.com/16303/ds30217-16303296.pdf?src-supplier=Future+Electronics, ComponentLink1URL=https://datasheet.ciiva.com/16303/ds30217-16303296.pdf?src-supplier=Future+Electronics, ComponentLink2Description=https://datasheet.ciiva.com/27092/1538419-27092484.pdf?src-supplier=Jameco, ComponentLink2URL=https://datasheet.ciiva.com/27092/1538419-27092484.pdf?src-supplier=Jameco, ComponentLink3Description=https://datasheet.ciiva.com/912/ds30217-912801.pdf?src-supplier=Digi-Key, ComponentLink3URL=https://datasheet.ciiva.com/912/ds30217-912801.pdf?src-supplier=Digi-Key, ComponentLink4Description=https://datasheet.ciiva.com/1177/ds30217-1177089.pdf?src-supplier=Element14, ComponentLink4URL=https://datasheet.ciiva.com/1177/ds30217-1177089.pdf?src-supplier=Element14, ComponentLink5Description=https://datasheet.ciiva.com/912/ds30217-912802.pdf?src-supplier=Digi-Key, ComponentLink5URL=https://datasheet.ciiva.com/912/ds30217-912802.pdf?src-supplier=Digi-Key, ComponentLink6Description=https://datasheet.ciiva.com/912/ds30217-912803.pdf?src-supplier=Digi-Key, ComponentLink6URL=https://datasheet.ciiva.com/912/ds30217-912803.pdf?src-supplier=Digi-Key, ComponentLink7Description=https://datasheet.ciiva.com/8303/ds30217-8303132.pdf?src-supplier=Avnet, ComponentLink7URL=https://datasheet.ciiva.com/8303/ds30217-8303132.pdf?src-supplier=Avnet, ComponentLink8Description=https://datasheet.ciiva.com/25919/ds30217-25919644.pdf?src-supplier=Avnet+Europe, ComponentLink8URL=https://datasheet.ciiva.com/25919/ds30217-25919644.pdf?src-supplier=Avnet+Europe, Contact Plating=Tin,Matte, Current Rating=1A, Element Configuration=Single, Forward Current=1A, Height=1.25mm, Lead Free="Lead Free", Length=2.85mm, Manufacturer Part Number=1N5819HW-7-F, Max Reverse Voltage (DC)=40V, Number of Pins=2, Output Current=1A, Packaging="Tape and Reel", Peak Non-Repetitive Surge Current=25A, Polarity=Standard, Pricing 1="1=0.40000, 10=0.30100, 25=0.26360, 100=0.14310, 500=0.11678, 1000=0.08664 (USD)", Radiation Hardening=No, REACH SVHC="No SVHC", RoHS=Yes, Stock 1=502732, Supplier 1=Digi-Key, Termination=SMD/SMT, Voltage Rating (DC)=40V, Weight=0.000353oz, Width=1.7mm
D2: library part 150080SS75000, "WURTH ELEKTRONIK   150080SS75000   LED, 0805, SUP RED, 60MCD, 630NM", Case Code (Imperial)=0805, Case Code (Metric)=2012, Color=Red, Forward Current=30mA, Forward Voltage=1.9V, Manufacturer="Wurth Electronics", Max Operating Temperature=85°C, Min Operating Temperature=-40°C, Package Quantity=4000, Supplier Part Number 1=732-4985-1-ND, Test Current=20mA, Case/Package=0805, Category=LEDs, ComponentLink1Description=https://datasheet.ciiva.com/22656/150080ss75000-22656963.pdf?src-supplier=Element14, ComponentLink1URL=https://datasheet.ciiva.com/22656/150080ss75000-22656963.pdf?src-supplier=Element14, ComponentLink2Description=https://datasheet.ciiva.com/29279/759436-da-01-en-chipled-0805-w-kl-s-rot-150080ss75000-29279211.pdf?src-supplier=Conrad, ComponentLink2URL=https://datasheet.ciiva.com/29279/759436-da-01-en-chipled-0805-w-kl-s-rot-150080ss75000-29279211.pdf?src-supplier=Conrad, ComponentLink3Description=https://datasheet.ciiva.com/29563/150080ss75000-29563014.pdf?src-supplier=Digi-Key, ComponentLink3URL=https://datasheet.ciiva.com/29563/150080ss75000-29563014.pdf?src-supplier=Digi-Key, ComponentLink4Description=https://datasheet.ciiva.com/29563/150080ss75000-29563015.pdf?src-supplier=Digi-Key, ComponentLink4URL=https://datasheet.ciiva.com/29563/150080ss75000-29563015.pdf?src-supplier=Digi-Key, ComponentLink5Description=https://datasheet.ciiva.com/29563/150080ss75000-29563013.pdf?src-supplier=Digi-Key, ComponentLink5URL=https://datasheet.ciiva.com/29563/150080ss75000-29563013.pdf?src-supplier=Digi-Key, Dominant Wavelength=630nm, Height=0.7mm, Length=2mm, Lens Style=Clear,Rectangular, Luminous Intensity=60mcd, Manufacturer Part Number=150080SS75000, Mount="Surface Mount", Packaging="Tape and Reel", Pricing 1="1=0.18000, 50=0.16500, 100=0.14200, 500=0.12300 (USD)", REACH SVHC=Unknown, RoHS=Yes, Stock 1=6006, Supplier 1=Digi-Key, Viewing Angle=140°, Wavelength=630nm, Width=1.25mm
J1 J5 J6: library part 1724480002, Color=Black, Manufacturer=Molex, Supplier Part Number 1=WM16206-ND, Category="Headers and Wire Housings", ComponentLink1Description=https://www.molex.com/pdm_docs/sd/1724480002_sd.pdf?src-supplier=Digi-Key, ComponentLink1URL=https://www.molex.com/pdm_docs/sd/1724480002_sd.pdf?src-supplier=Digi-Key, Connector Type="Male Pin", Contact Plating=Tin, Fastening Type=Ramp, Glow Wire Compliant=Compliant, Manufacturer Part Number=1724480002, Mount="Through Hole", Number of Circuits=2, Number of Pins=2, Number of Positions=2, Number of Rows=2, Orientation="Right Angle", Packaging=Tray, Pricing 1="1=0.55000, 10=0.46000, 100=0.35780, 1000=0.28116, 5000=0.24708, 10000=0.23004 (USD)", RoHS=No, Row Spacing=0.165inch, Stock 1=6210, Supplier 1=Digi-Key, Termination=Solder
J2 J3 J4: "1~24 Poles, Screwless, 45Â°, 3.50 Pitch, 24~20 (AWG), Terminal Block Connector", Package=None, Supplier Part Number 1=102-6384-ND, Availability=Unavailable, Category=Connector, MF="CUI Devices", MP=TBL002A-350-08GR-2OR, Price=None, SnapEDA_Link=https://www.snapeda.com/parts/TBL002A-350-08GR-2OR/CUI%20Devices/view-part/3233590/?ref=snap, Supplier 1=Digi-Key
L1: library part SRR1260-221K, "BOURNS   SRR1260-221K   INDUCTOR, SHIELDED, 220UH, 1.3A, SMD", Case/Package=1260, Current Rating=1.38A, DC Resistance (DCR)=380mR, Frequency=4.2MHz, Inductance=220uH, Inductance Tolerance=10%, Manufacturer=Bourns, Max Operating Temperature=125°C, Min Operating Temperature=-40°C, Package="Nonstandard Bourns - J.W. Miller", Package Quantity=600, Resistance=380MR, Resistor Type=Wirewound, Saturation Current=1.3A, Supplier Part Number 1=SRR1260-221KCT-ND, Test Frequency=100kHz, Availability=Unavailable, Category=Inductor, ComponentLink1Description=https://datasheet.ciiva.com/11800/0900766b80defded-11800204.pdf?src-supplier=RSComponents, ComponentLink1URL=https://datasheet.ciiva.com/11800/0900766b80defded-11800204.pdf?src-supplier=RSComponents, ComponentLink2Description=https://datasheet.ciiva.com/7838/1430852-7838981.pdf?src-supplier=Element14, ComponentLink2URL=https://datasheet.ciiva.com/7838/1430852-7838981.pdf?src-supplier=Element14, ComponentLink3Description=https://datasheet.ciiva.com/1050/srr1260-1050007.pdf?src-supplier=Digi-Key, ComponentLink3URL=https://datasheet.ciiva.com/1050/srr1260-1050007.pdf?src-supplier=Digi-Key, ComponentLink4Description=https://datasheet.ciiva.com/17111/70277056-17111848.pdf?src-supplier=Allied+Electronics, ComponentLink4URL=https://datasheet.ciiva.com/17111/70277056-17111848.pdf?src-supplier=Allied+Electronics, ComponentLink5Description=https://datasheet.ciiva.com/23793/1914016-23793576.pdf?src-supplier=Newark, ComponentLink5URL=https://datasheet.ciiva.com/23793/1914016-23793576.pdf?src-supplier=Newark, ComponentLink6Description=https://datasheet.ciiva.com/17285/srr1260-17285833.pdf?src-supplier=Avnet+Europe, ComponentLink6URL=https://datasheet.ciiva.com/17285/srr1260-17285833.pdf?src-supplier=Avnet+Europe, ComponentLink7Description=https://datasheet.ciiva.com/8517/srr1260-8517134.pdf?src-supplier=Avnet, ComponentLink7URL=https://datasheet.ciiva.com/8517/srr1260-8517134.pdf?src-supplier=Avnet, ComponentLink8Description=https://datasheet.ciiva.com/22618/70796-22618159.pdf?src-supplier=Element14, ComponentLink8URL=https://datasheet.ciiva.com/22618/70796-22618159.pdf?src-supplier=Element14, ComponentLink9Description=https://datasheet.ciiva.com/28679/1430852-28679711.pdf?src-supplier=Element14, ComponentLink9URL=https://datasheet.ciiva.com/28679/1430852-28679711.pdf?src-supplier=Element14, ComponentLink10Description=https://datasheet.ciiva.com/1050/srr1260-1050006.pdf?src-supplier=Digi-Key, ComponentLink10URL=https://datasheet.ciiva.com/1050/srr1260-1050006.pdf?src-supplier=Digi-Key, ComponentLink11Description=https://datasheet.ciiva.com/1050/srr1260-1050008.pdf?src-supplier=Digi-Key, ComponentLink11URL=https://datasheet.ciiva.com/1050/srr1260-1050008.pdf?src-supplier=Digi-Key, Core Material=Ferrite, DC Current=1.38A, Depth=12.8mm, Height=6mm, Height - Seated (Max)=0.256inch, Length=12.5mm, Manufacturer Part Number=SRR1260-221K, Material=Steel, Max DC Current=1.38A, MF="Bourns - J.W. Miller", Military Standard=Not, Mount="Surface Mount", MP=SRR1260-221K, Number of Pins=2, Packaging="Tape and Reel", Price=None, Pricing 1="1=1.09000, 10=1.00800, 25=0.93000, 50=0.77500, 100=0.72850, 250=0.65100 (USD)", Q Factor=22, REACH SVHC="No SVHC", RMS Current (Irms)=1.38A, RoHS=Yes, Self Resonant Frequency=4.2MHz, Shielding=Shielded, SnapEDA_Link=https://www.snapeda.com/parts/SRR1260-221K/Bourns%20-%20J.W.%20Miller/view-part/50181/?ref=snap, Stock 1=17151, Supplier 1=Digi-Key, Termination=SMD/SMT, Tolerance=10%, Width=12.5mm
M1 M20 M21: library part CMP-12801-000014-1, "MOSFET 60V N-Ch Enh FET 20Vgss 0.8W 600pF", Case/Package=TO-236-3, Continuous Drain Current=2A, Drain to Source Breakdown Voltage=60V, Drain to Source Resistance=69mΩ, Gate To Source Voltage=20V, Input Capacitace At Vds="606pF @ 20V", Input Capacitance=606pF, Manufacturer="Diodes Inc.", Max Forward Diode Voltage=1.2V, Max Junction Temp=+150°C, Max Operating Temperature=150°C, Max Power Dissipation=800mW, Min Operating Temperature=-55°C, Package=SOT23, Power Dissipation=0.8W, Pulse Drain Current=12A, Supplier Part Number 1=DMN6075S-7DICT-ND, Temperature="-55°C to +150°C", Automotive=Yes, Automotive Grade="Grade 0", Category=Trans, ComponentLink1Description=http://www.mouser.com/ds/2/115/DMN6075S-532804.pdf?src-supplier=Mouser, ComponentLink1URL=http://www.mouser.com/ds/2/115/DMN6075S-532804.pdf?src-supplier=Mouser, ComponentLink2Description=Datasheet, ComponentLink2URL=https://www.diodes.com/assets/Datasheets/DMN6075S.pdf, ComponentLink3Description=https://www.diodes.com/assets/Datasheets/DMN6075S.pdf?src-supplier=Digi-Key, ComponentLink3URL=https://www.diodes.com/assets/Datasheets/DMN6075S.pdf?src-supplier=Digi-Key, Continuous Drain Current (ID)=2A, Depletion Mode=False, Device Class L1="Discrete Semiconductors", Device Class L2=Transistors, Device Class L3=MOSFETs, Digikey Description="MOSFET N-CH 60V 2A SOT23-3", Drain To Source Voltage=60V, Drain to Source Voltage (Vdss)=60V, Footprint Url=https://www.diodes.com/assets/Package-Files/SOT23.pdf, Gate Charge At Vgs="12.3nC @ 10V", Height=1.1mm, Lead Free=Yes, Manufacturer Part Number=DMN6075S-7, Mount="Surface Mount", Mouser Description="MOSFET 60V N-Ch Enh FET 20Vgss 0.8W 600pF", Number of Channels=1, Number Of N Channels=1, Octopart=https://octopart.com/dmn6075s-7-diodes+inc.-55697882, Packaging="Tape and Reel", Pricing 1="1=0.33000, 10=0.23000, 25=0.21440, 100=0.11630, 500=0.09486, 1000=0.07038 (USD)", Rds On Max=85mR, RoHS=TRUE, Rthja Max=157°C/W, Standoff Height=0.013mm, Stock 1=363651, Supplier 1=Digi-Key, Temperature Range High=+150°C, Temperature Range Low=-55°C, Threshold Vgs Max=3V, Threshold Vgs Min=1V, Turn Off Delay Time=35ns, Turn On Delay Time=3.5ns
P3 P4: "Header, 11-Pin", LatestRevisionDate=17-Jul-2002, LatestRevisionNote="Re-released for DXP Platform.", Publisher="Altium Limited"
R1: library part ERJ-6ENF1004V, "Res Thick Film 0805 1M Ohm 1% 1/8W ±100ppm/°C Molded SMD Punched Carrier T/R", Case Code (Imperial)=0805, Case Code (Metric)=2012, Manufacturer=Panasonic, Max Operating Temperature=155°C, Max Power Dissipation=125mW, Min Operating Temperature=-55°C, Package Quantity=1, Supplier Part Number 1=P1.00MCCT-ND, Temperature Coefficient=100ppm/°C, Tolerance=1%, Voltage Rating=150V, Case/Package=0805, Category=Resistor, ComponentLink1Description=https://datasheet.ciiva.com/11821/0900766b80f80784-11821573.pdf?src-supplier=RSComponents, ComponentLink1URL=https://datasheet.ciiva.com/11821/0900766b80f80784-11821573.pdf?src-supplier=RSComponents, ComponentLink2Description=https://datasheet.ciiva.com/16761/70260748-16761141.pdf?src-supplier=Allied+Electronics, ComponentLink2URL=https://datasheet.ciiva.com/16761/70260748-16761141.pdf?src-supplier=Allied+Electronics, ComponentLink3Description=https://datasheet.ciiva.com/22749/426256-22749637.pdf?src-supplier=Element14, ComponentLink3URL=https://datasheet.ciiva.com/22749/426256-22749637.pdf?src-supplier=Element14, ComponentLink4Description=https://datasheet.ciiva.com/30161/aoa0000ce2-30161525.pdf?src-supplier=Onlinecomponents.com, ComponentLink4URL=https://datasheet.ciiva.com/30161/aoa0000ce2-30161525.pdf?src-supplier=Onlinecomponents.com, ComponentLink5Description=https://datasheet.ciiva.com/48532/aoa0000ce2-48532149.pdf?src-supplier=Avnet, ComponentLink5URL=https://datasheet.ciiva.com/48532/aoa0000ce2-48532149.pdf?src-supplier=Avnet, ComponentLink6Description=https://datasheet.ciiva.com/8079/426256-8079622.pdf?src-supplier=Element14, ComponentLink6URL=https://datasheet.ciiva.com/8079/426256-8079622.pdf?src-supplier=Element14, ComponentLink7Description=https://datasheet.ciiva.com/27055/1988997-27055735.pdf?src-supplier=Jameco, ComponentLink7URL=https://datasheet.ciiva.com/27055/1988997-27055735.pdf?src-supplier=Jameco, ComponentLink8Description=https://datasheet.ciiva.com/5868/426256-5868184.pdf?src-supplier=Farnell, ComponentLink8URL=https://datasheet.ciiva.com/5868/426256-5868184.pdf?src-supplier=Farnell, ComponentLink9Description=https://datasheet.ciiva.com/46420/1678782-46420186.pdf?src-supplier=Element14, ComponentLink9URL=https://datasheet.ciiva.com/46420/1678782-46420186.pdf?src-supplier=Element14, ComponentLink10Description=https://datasheet.ciiva.com/16788/70260748-16788299.pdf?src-supplier=Allied+Electronics, ComponentLink10URL=https://datasheet.ciiva.com/16788/70260748-16788299.pdf?src-supplier=Allied+Electronics, ComponentLink11Description=https://datasheet.ciiva.com/7909/426256-7909229.pdf?src-supplier=Element14, ComponentLink11URL=https://datasheet.ciiva.com/7909/426256-7909229.pdf?src-supplier=Element14, ComponentLink12Description=https://datasheet.ciiva.com/15158/getdatasheetpartid-246555-15158845.pdf?src-supplier=Verical, ComponentLink12URL=https://datasheet.ciiva.com/15158/getdatasheetpartid-246555-15158845.pdf?src-supplier=Verical, ComponentLink13Description=http://datasheet.octopart.com/ERJ-6ENF1004V-Panasonic-datasheet-5313456.pdf?src-supplier=Farnell, ComponentLink13URL=http://datasheet.octopart.com/ERJ-6ENF1004V-Panasonic-datasheet-5313456.pdf?src-supplier=Farnell, ComponentLink14Description=http://datasheet.octopart.com/ERJ-6ENF1004V-Panasonic-datasheet-13266541.pdf?src-supplier=Allied+Electronics, ComponentLink14URL=http://datasheet.octopart.com/ERJ-6ENF1004V-Panasonic-datasheet-13266541.pdf?src-supplier=Allied+Electronics, ComponentLink15Description=http://datasheet.octopart.com/ERJ-6ENF1004V-Panasonic-datasheet-48891056.pdf?src-supplier=Newark, ComponentLink15URL=http://datasheet.octopart.com/ERJ-6ENF1004V-Panasonic-datasheet-48891056.pdf?src-supplier=Newark, ComponentLink16Description=http://datasheet.octopart.com/ERJ-6ENF1004V-Panasonic-datasheet-8853621.pdf?src-supplier=Future+Electronics, ComponentLink16URL=http://datasheet.octopart.com/ERJ-6ENF1004V-Panasonic-datasheet-8853621.pdf?src-supplier=Future+Electronics, ComponentLink17Description=http://datasheet.octopart.com/ERJ-6ENF1004V-Panasonic-datasheet-10025800.pdf?src-supplier=Future+Electronics, ComponentLink17URL=http://datasheet.octopart.com/ERJ-6ENF1004V-Panasonic-datasheet-10025800.pdf?src-supplier=Future+Electronics, ComponentLink18Description=http://datasheet.octopart.com/ERJ-6ENF1004V-Panasonic-datasheet-136608610.pdf?src-supplier=Farnell, ComponentLink18URL=http://datasheet.octopart.com/ERJ-6ENF1004V-Panasonic-datasheet-136608610.pdf?src-supplier=Farnell, ComponentLink19Description=http://datasheet.octopart.com/ERJ-6ENF1004V-Panasonic-datasheet-41391857.pdf?src-supplier=Electro+Sonic, ComponentLink19URL=http://datasheet.octopart.com/ERJ-6ENF1004V-Panasonic-datasheet-41391857.pdf?src-supplier=Electro+Sonic, ComponentLink20Description=http://datasheet.octopart.com/ERJ-6ENF1004V-Panasonic-datasheet-7538305.pdf?src-supplier=Jameco, ComponentLink20URL=http://datasheet.octopart.com/ERJ-6ENF1004V-Panasonic-datasheet-7538305.pdf?src-supplier=Jameco, ComponentLink21Description=http://datasheet.octopart.com/ERJ-6ENF1004V-Panasonic-datasheet-78375410.pdf, ComponentLink21URL=http://datasheet.octopart.com/ERJ-6ENF1004V-Panasonic-datasheet-78375410.pdf, ComponentLink22Description=http://datasheet.octopart.com/ERJ-6ENF1004V-Panasonic-datasheet-82288794.pdf?src-supplier=Future+Electronics, ComponentLink22URL=http://datasheet.octopart.com/ERJ-6ENF1004V-Panasonic-datasheet-82288794.pdf?src-supplier=Future+Electronics, ComponentLink23Description=http://datasheet.octopart.com/ERJ-6ENF1004V-Panasonic-datasheet-118602.pdf?src-supplier=Digi-Key, ComponentLink23URL=http://datasheet.octopart.com/ERJ-6ENF1004V-Panasonic-datasheet-118602.pdf?src-supplier=Digi-Key, ComponentLink24Description=http://datasheet.octopart.com/ERJ-6ENF1004V-Panasonic---ECG-datasheet-15994758.pdf?src-supplier=Farnell, ComponentLink24URL=http://datasheet.octopart.com/ERJ-6ENF1004V-Panasonic---ECG-datasheet-15994758.pdf?src-supplier=Farnell, Composition="Thick Film", Contact Plating=Tin, Depth=1.25mm, Features="Automotive AEC-Q200", Height=0.6mm, Lead Free="Lead Free", Length=2mm, Manufacturer Part Number=ERJ-6ENF1004V, Military Standard=Not, Mount="Surface Mount", Number of Pins=2, Number of Terminations=2, Packaging="Tape and Reel", Power Rating=125mW, Pricing 1="1=0.10000, 10=0.06900, 100=0.02650, 1000=0.01166, 2500=0.01007 (USD)", Radiation Hardening=No, REACH SVHC="No SVHC", Resistance=1MR, Stock 1=249385, Supplier 1=Digi-Key, Termination=SMD/SMT, Voltage Rating (DC)=150V, Width=1.2mm